# Altium PCB PCB_2021-02-18_22-55-23_2021-02-19_21-30-21.pcbdoc
Units mm, origin at the board's own origin, x right, y up, seen from the top; angles counter-clockwise.
Board outline 51.9 x 79.5 mm, 2 copper layers (Top Layer, Bottom Layer); 10 components, 32 nets, 54 pads, 1 vias.
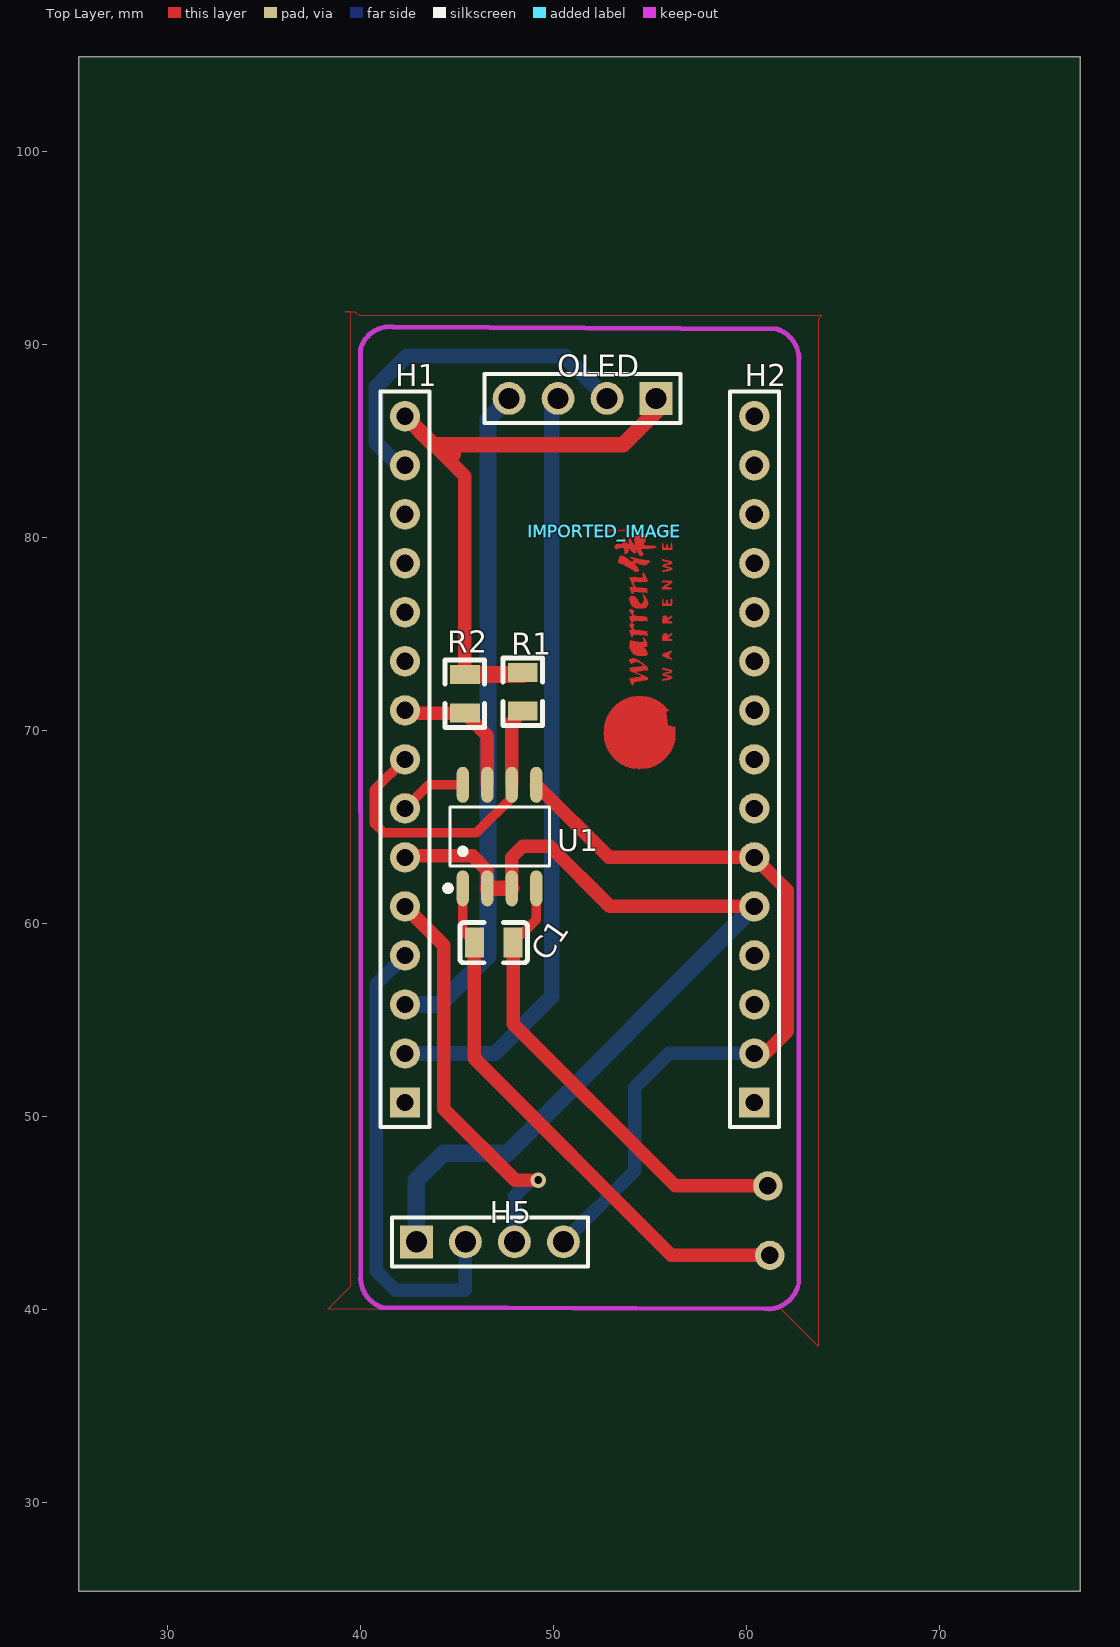
[diagram p0: Top Layer view]
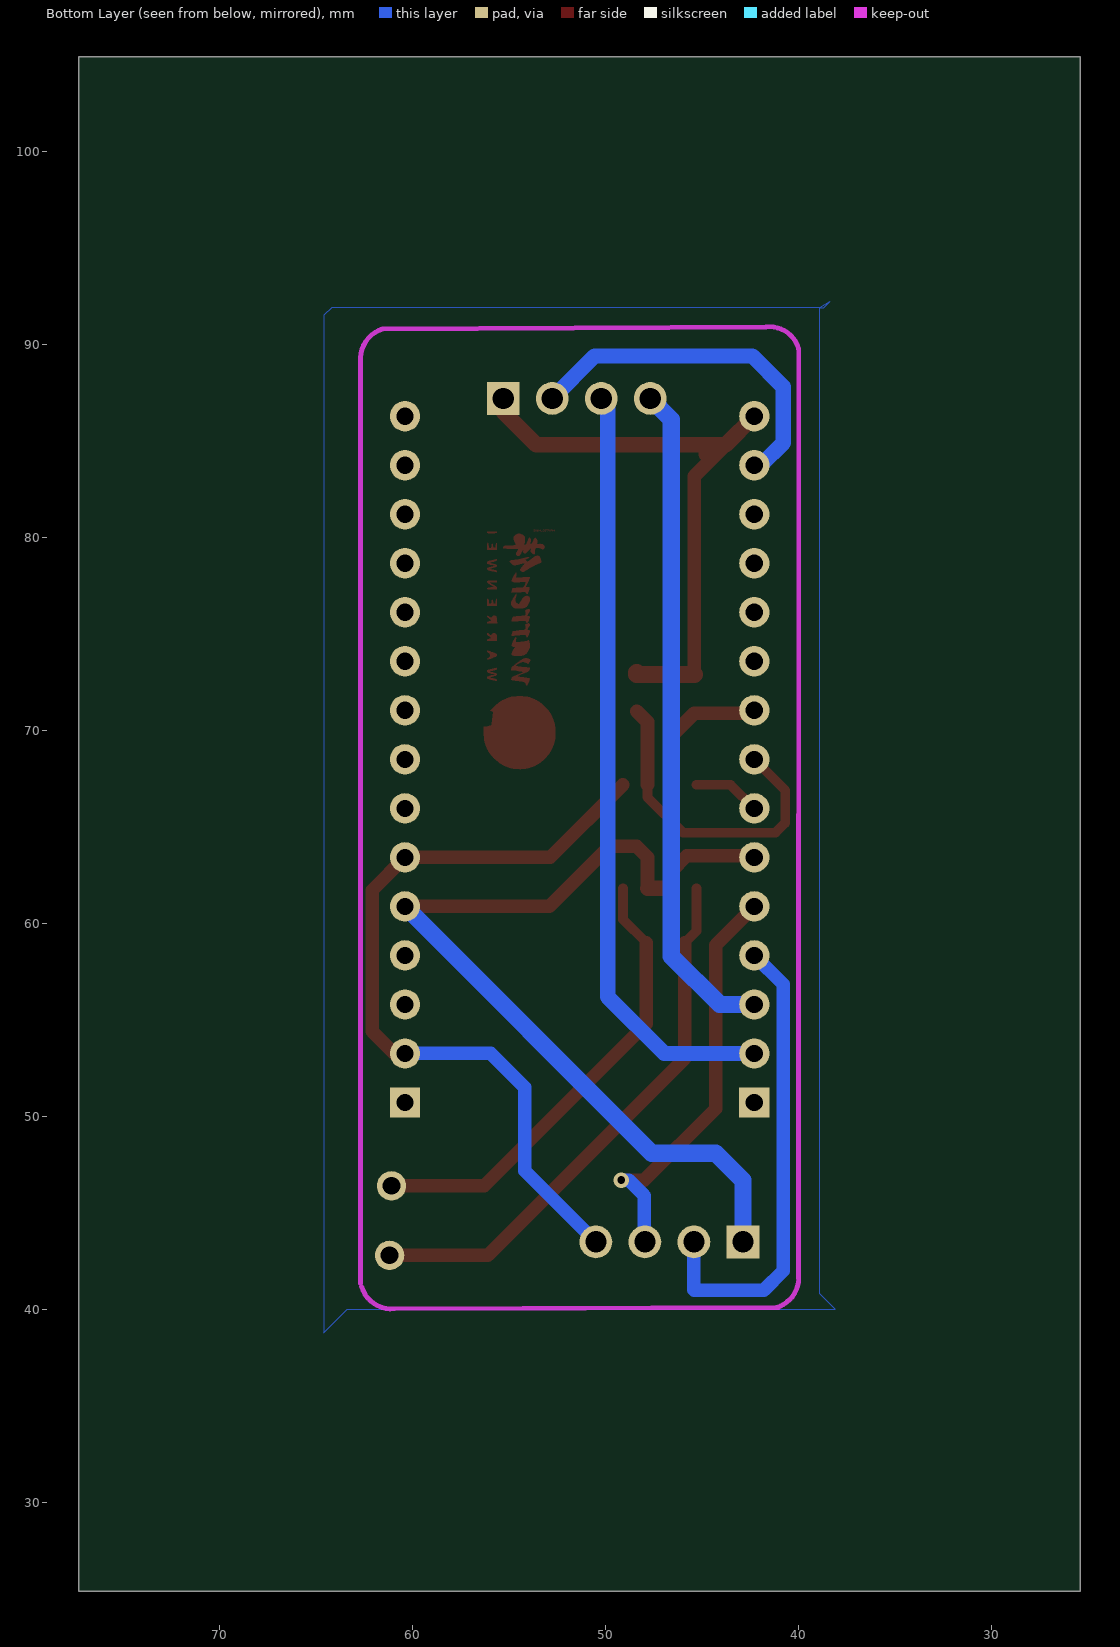
[diagram p1: Bottom Layer view, seen from below]

## Layer stack, top to bottom
Top Layer: signal copper (thickness not stored)
Dielectric: dielectric 0.32, FR-4, Dk 4.8
Bottom Layer: signal copper (thickness not stored)

## Board outline
77.3,25.4 25.4,25.4 25.4,104.9 77.3,104.9

## Components (designator, comment, footprint, x,y, rotation, side; value= is the part's Value field where it differs from the comment)
C1 "0.1u" C0805 46.9,59 r0 top
H1 "1" HDR-TH_15P-P2.54-V 42.3,68.5 r90 top
H2 "2" HDR-TH_15P-P2.54-V 60.4,68.5 r90 top
H5 "77311-462K04LF" HDR-TH_4P-P2.54-V 46.7,43.5 r0 top
IMPORTED_IMAGE "IMPORTED_IMAGE" IMPORTED_IMAGE#1 52.612,80.299 r0 top
IMPORTED_IMAGE "IMPORTED_IMAGE" IMPORTED_IMAGE#2 52.646,80.322 r0 top
OLED "77311-462K04LF" HDR-TH_4P-P2.54-V 51.5,87.2 r180 top
R1 "1k" R0805 48.4,72 r270 top
R2 "1k" R0805 45.4,71.9 r270 top
U1 "L9110S_C513306" SOP-8_L4.9-W3.9-P1.27-LS6.0-BL 47.2,64.5 r0 top

## Footprints (in the part's own frame and the unit in brackets; to place one, negate y for a bottom-side part, rotate by r counter-clockwise, add the part's x,y. Pads: shape width x height; smd on the part's side, far side on the other; paste and mask are expansions set on the pad)
C0805 [mm]
  rect 1x1.55 smd: 1(-1,0) 2(1,0)
  silkscreen extent -1.75,-1.04 1.75,1.04
HDR-TH_4P-P2.54-V [mm]
  rect 1.7x1.7 hole 1.1: 1(-3.81,0)
  round 1.7 hole 1.1: 2(-1.27,0) 3(1.27,0) 4(3.81,0)
  silkscreen extent -5.08,-1.27 5.08,1.27
HDR-TH_15P-P2.54-V [mil]
  rect 62x62 hole 35: 1(-700,0)
  round 62 hole 35: 2(-600,0) 3(-500,0) 4(-400,0) 5(-300,0) 6(-200,0) 7(-100,0) 8(0,0) 9(100,0) 10(200,0) 11(300,0) 12(400,0) 13(500,0) 14(600,0) 15(700,0)
  silkscreen extent -750,-50 750,50
IMPORTED_IMAGE#1 [mm]
  Top Layer region: 653 vertices and 3 holes, not listed, extent -0.002,-12.3 3.698,-8.542
  Top Layer region: 383 vertices and 0 holes, not listed, extent 1.29,-7.96 2.288,-6.565
  Top Layer region: 193 vertices and 0 holes, not listed, extent 3.023,-7.728 3.528,-7.062
  Top Layer region: 107 vertices and 1 holes, not listed, extent 3.023,-6.622 3.525,-6.174
  Top Layer region: 209 vertices and 1 holes, not listed, extent 1.317,-6.435 2.258,-5.485
  Top Layer region: 93 vertices and 1 holes, not listed, extent 3.023,-5.66 3.529,-5.266
  Top Layer region: 173 vertices and 0 holes, not listed, extent 1.316,-5.469 2.257,-4.756
  Top Layer region: 97 vertices and 1 holes, not listed, extent 3.017,-4.756 3.529,-4.352
  Top Layer region: 201 vertices and 0 holes, not listed, extent 1.316,-4.73 2.255,-4.018
  Top Layer region: 219 vertices and 1 holes, not listed, extent 1.315,-3.978 2.284,-3.218
  Top Layer region: 3.271,-3.845 3.023,-3.853 3.023,-3.671 3.025,-3.599 3.03,-3.541 3.038,-3.503 3.048,-3.489 3.051,-3.49 3.053,-3.492 3.056,-3.495 3.058,-3.499 3.06,-3.505 3.062,-3.511 3.064,-3.519 3.066,-3.527 3.068,-3.536 3.069,-3.546 3.071,-3.557 3.072,-3.568 3.073,-3.58 3.073,-3.592 3.074,-3.605 3.074,-3.618 3.074,-3.66 3.075,-3.692 3.078,-3.715 3.084,-3.73 3.093,-3.74 3.107,-3.745 3.125,-3.747 3.15,-3.748 3.163,-3.747 3.174,-3.747 3.184,-3.746 3.193,-3.745 3.2,-3.743 3.206,-3.741 3.211,-3.737 3.215,-3.732 3.219,-3.727 3.221,-3.72 3.223,-3.711 3.225,-3.702 3.226,-3.69 3.226,-3.677 3.227,-3.661 3.227,-3.644 3.229,-3.597 3.235,-3.564 3.247,-3.546 3.265,-3.541 3.27,-3.541 3.274,-3.542 3.279,-3.544 3.282,-3.546 3.286,-3.55 3.289,-3.554 3.292,-3.559 3.294,-3.564 3.296,-3.571 3.298,-3.579 3.3,-3.587 3.301,-3.597 3.302,-3.607 3.303,-3.618 3.303,-3.631 3.303,-3.644 3.303,-3.677 3.305,-3.702 3.308,-3.72 3.314,-3.732 3.324,-3.741 3.337,-3.745 3.356,-3.747 3.38,-3.748 3.393,-3.748 3.404,-3.747 3.414,-3.746 3.423,-3.745 3.43,-3.743 3.437,-3.74 3.442,-3.736 3.446,-3.73 3.449,-3.723 3.452,-3.715 3.453,-3.704 3.455,-3.692 3.455,-3.677 3.456,-3.66 3.456,-3.641 3.456,-3.618 3.458,-3.556 3.464,-3.516 3.476,-3.495 3.495,-3.489 3.498,-3.489 3.501,-3.489 3.504,-3.49 3.506,-3.491 3.509,-3.492 3.511,-3.493 3.513,-3.494 3.515,-3.496 3.517,-3.498 3.518,-3.501 3.52,-3.503 3.521,-3.506 3.523,-3.51 3.524,-3.514 3.525,-3.518 3.526,-3.523 3.527,-3.528 3.527,-3.533 3.528,-3.539 3.528,-3.545 3.529,-3.552 3.529,-3.56 3.529,-3.567 3.529,-3.576 3.529,-3.585 3.529,-3.594 3.529,-3.604 3.529,-3.615 3.529,-3.626 3.528,-3.638 3.528,-3.65 3.527,-3.664 3.52,-3.838
  Top Layer region: 263 vertices and 0 holes, not listed, extent 1.326,-3.231 2.264,-2.119
  Top Layer region: 161 vertices and 0 holes, not listed, extent 3.023,-2.996 3.528,-2.535
  Top Layer region: 211 vertices and 0 holes, not listed, extent 3.023,-2.097 3.532,-1.438
  Top Layer region: 321 vertices and 0 holes, not listed, extent 0.733,-2.082 2.358,-1.25
  Top Layer region: 451 vertices and 1 holes, not listed, extent 0.551,-1.254 2.704,-0.111
  Top Layer region: 3.527,-0.756 3.535,-0.93 3.279,-0.93 3.023,-0.93 3.023,-0.762 3.025,-0.697 3.03,-0.644 3.037,-0.608 3.047,-0.594 3.052,-0.597 3.057,-0.604 3.062,-0.615 3.066,-0.63 3.07,-0.649 3.074,-0.67 3.077,-0.693 3.079,-0.717 3.081,-0.755 3.085,-0.784 3.089,-0.806 3.096,-0.822 3.105,-0.833 3.118,-0.84 3.134,-0.845 3.155,-0.848 3.166,-0.849 3.176,-0.85 3.185,-0.85 3.193,-0.85 3.2,-0.848 3.205,-0.846 3.21,-0.843 3.214,-0.838 3.218,-0.832 3.221,-0.825 3.223,-0.816 3.225,-0.806 3.227,-0.793 3.229,-0.779 3.23,-0.763 3.231,-0.745 3.237,-0.701 3.245,-0.666 3.254,-0.642 3.265,-0.633 3.27,-0.635 3.275,-0.642 3.28,-0.652 3.285,-0.665 3.289,-0.682 3.293,-0.7 3.296,-0.721 3.298,-0.743 3.301,-0.777 3.304,-0.803 3.309,-0.823 3.316,-0.836 3.326,-0.845 3.339,-0.85 3.357,-0.852 3.38,-0.853 3.392,-0.853 3.403,-0.852 3.413,-0.852 3.421,-0.85 3.428,-0.848 3.435,-0.844 3.44,-0.84 3.444,-0.834 3.448,-0.827 3.451,-0.818 3.453,-0.807 3.455,-0.793 3.457,-0.778 3.458,-0.761 3.46,-0.74 3.461,-0.717 3.466,-0.665 3.474,-0.621 3.484,-0.592 3.494,-0.582 3.497,-0.582 3.5,-0.585 3.502,-0.589 3.505,-0.595 3.507,-0.603 3.51,-0.611 3.512,-0.621 3.514,-0.633 3.517,-0.645 3.519,-0.659 3.521,-0.673 3.522,-0.688 3.524,-0.704 3.525,-0.721 3.526,-0.738
  Top Layer region: 3.278,-0.078 3.149,-0.076 3.072,-0.07 3.033,-0.058 3.023,-0.039 3.023,-0.036 3.023,-0.033 3.024,-0.03 3.025,-0.028 3.026,-0.026 3.028,-0.023 3.03,-0.021 3.033,-0.019 3.036,-0.017 3.04,-0.016 3.044,-0.014 3.048,-0.012 3.053,-0.011 3.059,-0.01 3.065,-0.009 3.072,-0.007 3.079,-0.006 3.087,-0.005 3.096,-0.005 3.105,-0.004 3.115,-0.003 3.126,-0.003 3.137,-0.002 3.149,-0.002 3.162,-0.001 3.176,-0.001 3.191,-0.001 3.206,0 3.223,0 3.24,0 3.258,0 3.278,0 3.406,-0.002 3.484,-0.007 3.522,-0.019 3.532,-0.039 3.532,-0.042 3.532,-0.044 3.531,-0.047 3.53,-0.05 3.529,-0.052 3.527,-0.054 3.525,-0.056 3.522,-0.058 3.519,-0.06 3.516,-0.062 3.512,-0.064 3.507,-0.065 3.502,-0.066 3.496,-0.068 3.49,-0.069 3.484,-0.07 3.476,-0.071 3.468,-0.072 3.46,-0.073 3.45,-0.074 3.44,-0.074 3.43,-0.075 3.418,-0.075 3.406,-0.076 3.393,-0.076 3.379,-0.077 3.364,-0.077 3.349,-0.077 3.332,-0.077 3.315,-0.077 3.297,-0.078
IMPORTED_IMAGE#2 [mm]
R0805 [mm]
  rect 1x1.55 smd: 1(-1,0) 2(1,0)
  silkscreen extent -1.75,-1.02 1.75,1.02
SOP-8_L4.9-W3.9-P1.27-LS6.0-BL [mm]
  oval 0.63x1.865 smd: 1(-1.905,-2.682) 2(-0.635,-2.682) 3(0.635,-2.682) 4(1.905,-2.682) 5(1.905,2.682) 6(0.635,2.682) 7(-0.635,2.682) 8(-1.905,2.682)
  silkscreen extent -2.82,-2.83 2.58,1.52

## Free pads (board coordinates)
  round 1.524 hole 0.914: 1(61.2,42.8) 2(61.1,46.4)

## Via types
v1: diameter 0.8, hole 0.4, Top Layer to Bottom Layer, 1 vias

## Nets (pads, with @x,y where several pads share a name; then routed paths per layer and width w, separated by ;. In a path a pad name is that pad's centre, name@x,y a point inside that pad or via, vN(x,y) a via of type N, cw(c..) or ccw(c..) an arc to the next point about the centre after c; other vN are vias at no path point)
3V3: H1.6 H1.15 H2.5 H5.1 OLED.1 R1.1 R2.1 U1.2 U1.3 | length 82.4
  Top Layer w0.5: U1.3@47.8,61.852 U1.3
  Top Layer w0.7: H1.6 42.38,63.5 45.8,63.5 46.565,62.735 U1.2 ; H1.15 45.4,83.18 R2.1 ; U1.3 47.835,63.435 48.4,64 49.801,63.999 52.92,60.88 H2.5@60.4,60.88
  Top Layer w0.8: H1.15 43.78,84.8 53.6,84.8 55.31,86.51 OLED.1 ; 44.8,84.3 44.8,84.8 ; U1.2@46.565,61.817 47.213,61.817 U1.3
  Top Layer w0.9: R2.1@45.399,72.899 48.399,72.899 R1.1
  Bottom Layer w0.9: H5.1 42.89,46.69 44.3,48.1 47.62,48.1 H2.5@60.4,60.88
A0: H2.15
CLK: H2.7
CMD: H2.9
D0: H1.1
D1: H1.2 OLED.3 | length 40
  Bottom Layer w0.8: H1.2 46.96,53.26 49.9,56.2 49.9,86.87 OLED.3
D2: H1.3 OLED.4 | length 34.7
  Bottom Layer w0.9: H1.3 44.1,55.8 46.6,58.3 46.6,86.11 OLED.4
D3: H1.4 H5.2 | length 24.5
  Bottom Layer w0.7: H1.4 40.8,56.84 40.8,42 41.8,41 45.4,41 45.43,41.03 H5.2
D4: H1.5 H5.3 | length 21.7
  Top Layer w0.7: H1.5 44.3,58.88 44.3,50.4 48,46.7 v1(49.2,46.7)
  Bottom Layer w0.7: H5.3 48,43.53 48,45.9 48.8,46.7 v1(49.2,46.7)
D5: H1.8 R1.2 U1.6 | length 16.8
  Top Layer w0.5: H1.8 40.7,66.9 40.7,65.2 41.2,64.7 46,64.7 47.835,66.535 U1.6
  Top Layer w0.7: U1.6 47.835,70.435 R1.2
D6: H1.9 R2.2 U1.7 | length 7.4
  Top Layer w0.7: H1.9 42.44,70.9 R2.2 46.565,69.735 U1.7
D7: H1.10
D8: H1.11
EN: H2.4
GND: H1.7 H1.14 H2.2 H2.6 H5.4 OLED.2 U1.5 U1.8 | length 63.1
  Top Layer w0.5: H1.7 43.522,67.182 U1.8
  Top Layer w0.7: U1.5 52.867,63.42 H2.6 62.1,61.72 62.1,54.4 60.96,53.26 H2.2
  Bottom Layer w0.7: H5.4 54.2,47.19 54.2,51.5 55.96,53.26 H2.2@60.4,53.26
  Bottom Layer w0.8: H1.14 41.96,83.74 40.8,84.9 40.8,87.8 42.4,89.4 50.57,89.4 OLED.2
RST: H2.3
RSV: H2.13 H2.14
RX: H1.12
S$705: 
S$716: 
S$718: 
S$726: 
S$728: 
S$730: 
SD0: H2.8
SD1: H2.10
SD2: H2.11
SD3: H2.12
TX: H1.13
U1_1: C1.1 pad.1 U1.1 | length 28.6
  Top Layer w0.5: U1.1 45.295,59.605 C1.1
  Top Layer w0.7: C1.1 45.899,53.001 56.1,42.8 pad.1@61.2,42.8
U1_4: C1.2 pad.2 U1.4 | length 24.2
  Top Layer w0.5: C1.2 49.105,60.205 U1.4
  Top Layer w0.7: C1.2@47.901,59 47.901,54.799 56.301,46.399 pad.2@61.099,46.399
VIN: H2.1

## Polygon pours and split planes (outlines as drawn)
GND on Top Layer (solid): 38.3,40 39.5,41.2 39.5,91.7 39.2,91.7 39.5,91.7 39.7,91.7 39.9,91.5 63.9,91.5 63.7,91.3 63.7,38.1 61.8,40 38.3,40
GND on Bottom Layer (solid): 38.1,40 38.9,40.8 38.9,91.9 38.7,91.9 38.4,92.2 38.9,91.9 64.2,91.9 64.6,91.5 64.6,38.8 63.4,40 38.1,40

## Keep-outs
Keep-Out Layer:
  lines w0.254 net S$705: 40,41.6 ccw(c41.618,41.645) 41.143,40.098 ; 40.003,89.763 cw(c41.5,89.362) 41.7,90.9 ; 60.95,40.033 ccw(c61.101,41.644) 62.649,41.174 ; 61.563,90.797 cw(c61.088,89.25) 62.7,89.1